# EAGLE board 001 (EAGLE 9.2.2)
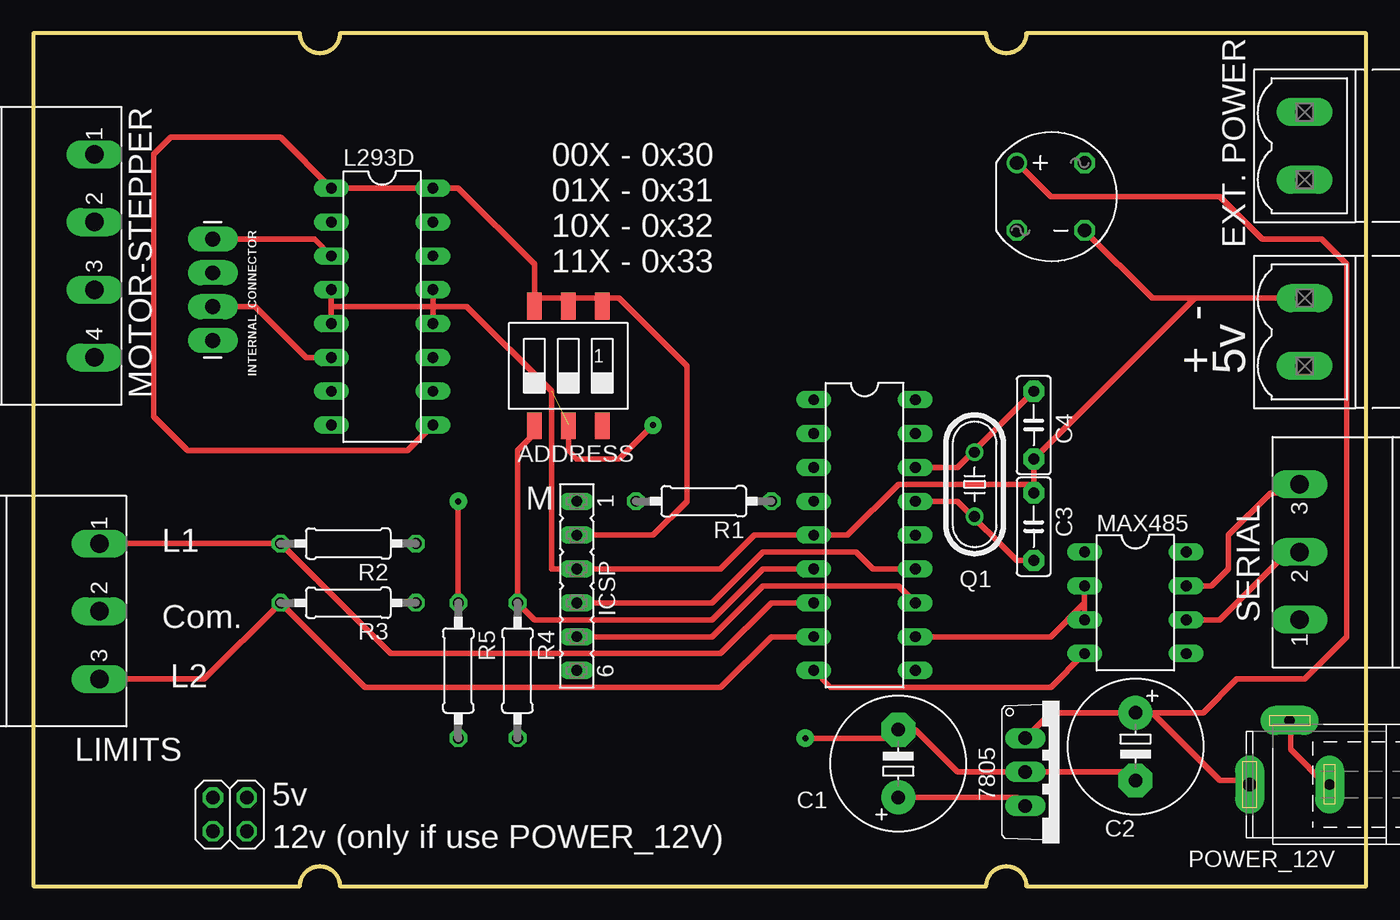
[diagram p0: board, top side]
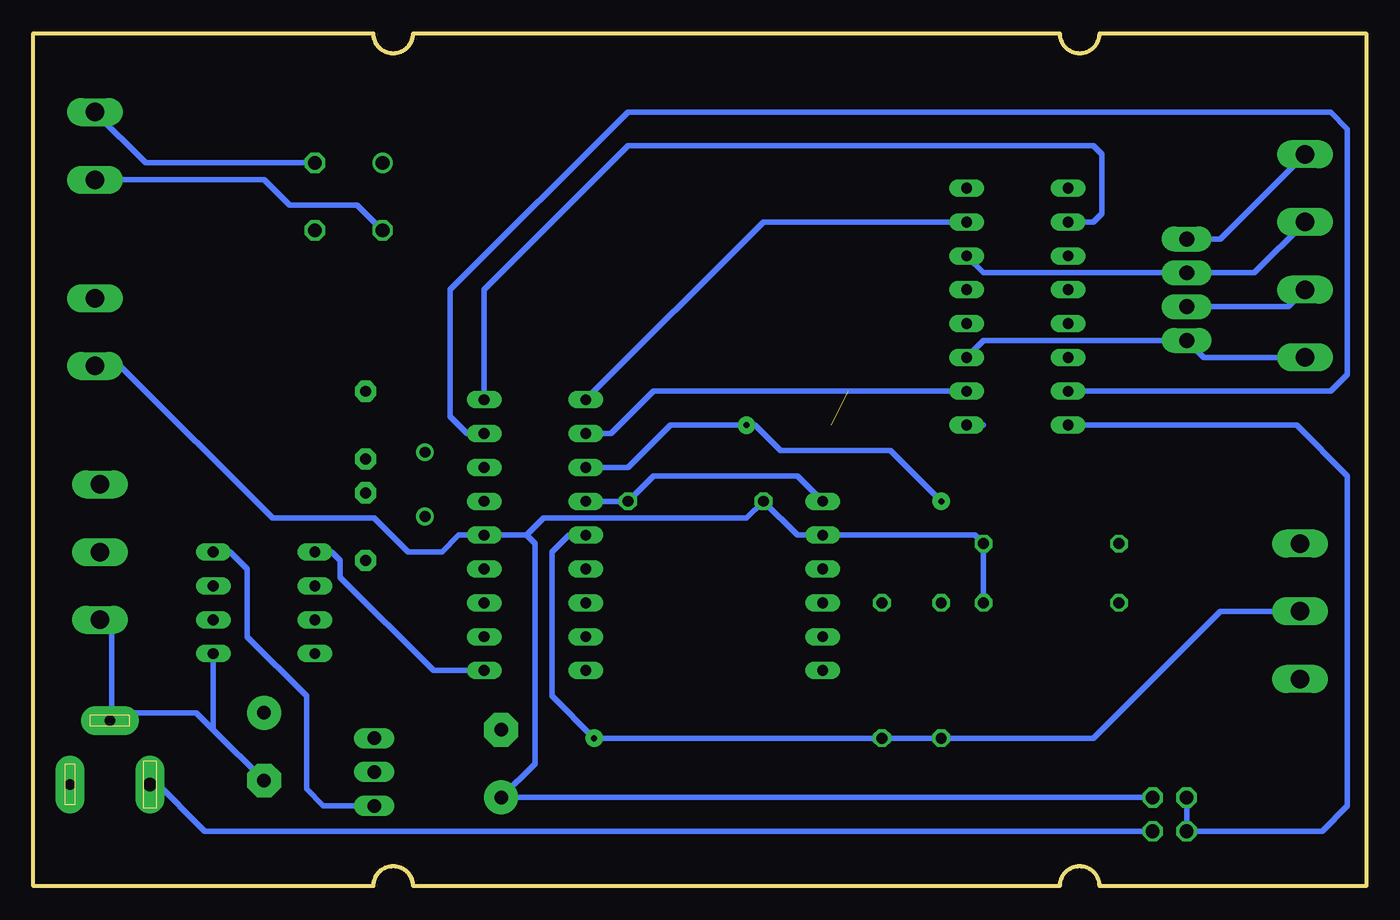
[diagram p1: board, bottom side, seen from below]

Size 100 x 64 mm. Coordinates in mm from the lower left corner, seen from the top.
Outline: 0,0 20,0 arc-180 23,0 71.5,0 arc-180 74.5,0 100,0 100,64 74.5,64 arc-180 71.5,64 23,64 arc-180 20,64 0,64 0,0
Copper layers (1*16): Top 0.035mm / dielectric 1.5mm / Bottom 0.035mm
Design rules "default": minimum track width 6mil, minimum drill 0.35mm, track to track 6mil, track to pad 6mil, pad to pad 6mil, via to via 6mil, smd to smd 6mil, copper to edge 40mil, drill to drill 6mil, minimum pad ring 10mil, minimum via ring 8mil, stop-mask expansion 4mil, vias tented up to drill 0mil, thermal gap 10mil

## Footprints (pad centres in the part's own frame; a part is rotated, then mirrored left to right if it is on the bottom)
2X02 = drill 1.016 octagon: 1 -1.27,-1.27; 2 -1.27,1.27; 3 1.27,-1.27; 4 1.27,1.27
TO220V = drill 1.016 long: 1 -2.54,-2.54; 2 0,-2.54; 3 2.54,-2.54
SMS-003 = smd 1.092 x 2.007: 1 -2.54,-4.496; 2 0,-4.496; 3 2.54,-4.496; 4 2.54,4.496; 5 0,4.496; 6 -2.54,4.496
E5-10,5 = drill 1.016 pad 2.54: + -2.54,0 | drill 1.016 pad 2.54 octagon: - 2.54,0
C5B2.5 = drill 0.813 pad 1.6 octagon: 1 -2.54,0; 2 2.54,0
MSTBV2R = drill 1.397 long: 1 -2.54,0; 2 2.54,0
RB1A = drill 1.016: + -2.54,2.54 | drill 1.016 octagon: - 2.54,-2.54; AC1 2.54,2.54; AC2 -2.54,-2.54
FE06 = drill 0.813 long: 1 -6.35,0; 2 -3.81,0; 3 -1.27,0; 4 1.27,0; 5 3.81,0; 6 6.35,0
1X04_LONGPADS = drill 1.118 pad 1.88 long: 1 0,0; 2 2.54,0; 3 5.08,0; 4 7.62,0
DIL16 = drill 0.813 long: 1 -8.89,-3.81; 2 -6.35,-3.81; 3 -3.81,-3.81; 4 -1.27,-3.81; 5 1.27,-3.81; 6 3.81,-3.81; 7 6.35,-3.81; 8 8.89,-3.81; 9 8.89,3.81; 10 6.35,3.81; 11 3.81,3.81; 12 1.27,3.81; 13 -1.27,3.81; 14 -3.81,3.81; 15 -6.35,3.81; 16 -8.89,3.81
MSTBA3 = drill 1.397 long: 1 -5.08,5.08; 2 0,5.08; 3 5.08,5.08
DIL08 = drill 0.813 long: 1 -3.81,-3.81; 2 -1.27,-3.81; 3 1.27,-3.81; 4 3.81,-3.81; 5 3.81,3.81; 6 1.27,3.81; 7 -1.27,3.81; 8 -3.81,3.81
MSTBA4 = drill 1.397 long: 1 -7.62,5.08; 2 -2.54,5.08; 3 2.54,5.08; 4 7.62,5.08
DIL18 = drill 0.813 long: 1 -10.16,-3.81; 2 -7.62,-3.81; 3 -5.08,-3.81; 4 -2.54,-3.81; 5 0,-3.81; 6 2.54,-3.81; 7 5.08,-3.81; 8 7.62,-3.81; 9 10.16,-3.81; 10 10.16,3.81; 11 7.62,3.81; 12 5.08,3.81; 13 2.54,3.81; 14 0,3.81; 15 -2.54,3.81; 16 -5.08,3.81; 17 -7.62,3.81; 18 -10.16,3.81
SPC4077 = drill 0.8 pad 2.184 long: 1 -3,0; 2 0,-4.8 | drill 1 pad 2.184 long: 3 3,0
HC49/S = drill 0.813: 1 -2.413,0; 2 2.413,0
0207/10 = drill 0.813 octagon: 1 -5.08,0; 2 5.08,0

## Placement (x,y rotation side)
12V_5V  [2X02]  14.74,5.39 0 top
7805  [TO220V]  76.97,8.56 270 top
ADDRESS  [SMS-003]  40.14,39.04 180 top
C1  [E5-10,5]  64.9,9.2 90 top
C2  [E5-10,5]  82.68,10.47 270 top
C3  [C5B2.5]  75.06,26.98 90 top
C4  [C5B2.5]  75.06,34.6 90 top
E$1  [MSTBV2R]  95.38,55.55 90 top
E$2  [MSTBV2R]  95.38,41.58 90 top
E$3  [RB1A]  76.33,51.74 0 top
ICSP  [FE06]  40.77,22.53 270 top
INTERNAL_CONNECTOR  [1X04_LONGPADS]  13.47,40.95 90 top
L293D  [DIL16]  26.17,43.49 270 top
LIMITS  [MSTBA3]  -0.13,20.63 270 top
MAX485  [DIL08]  82.68,21.26 270 top
MOTOR-STEPPER  [MSTBA4]  -0.5,47.3 270 top
PIC18F1  [DIL18]  62.36,26.34 270 top
POWER_12V  [SPC4077]  94.26,7.63 180 top
Q1  [HC49/S]  70.62,30.15 90 top
R1  10k  [0207/10]  50.3,28.88 180 top
R2  10k  [0207/10]  23.63,25.71 180 top
R3  10k  [0207/10]  23.63,21.26 180 top
R4  10k  [0207/10]  36.33,16.18 270 top
R5  10k  [0207/10]  31.88,16.18 270 top
SERIAL  [MSTBA3]  100.09,25.07 90 top

## Library data of the parts
12V_5V = pinhead
7805 = transistor
ADDRESS = smd-special
C1 C2 = rcl
C3 C4 = capacitor-wima
E$1 E$2 = con-phoenix-500
E$3 = rectifier
ICSP = con-lsta
INTERNAL_CONNECTOR = SparkFun-Connectors
L293D MAX485 PIC18F1 = 40xx
LIMITS MOTOR-STEPPER SERIAL = con-phoenix-508
POWER_12V = con-jack
Q1 = crystal
R1-R5 = resistor

## Nets
S$1: 12V_5V.1 12V_5V.2 L293D.8
S$2: MAX485.6
S$5: C3.1 PIC18F1.15
S$6: C4.2 PIC18F1.16
S$7: MAX485.2 MAX485.3 PIC18F1.11
S$8: MAX485.8
S$9: C2.- MAX485.5
S$10: MAX485.1
S$11: ICSP.1 PIC18F1.4 R1.1
S$12: L293D.2 PIC18F1.18
S$13: PIC18F1.6 R4.1
S$14: MAX485.4 PIC18F1.9
S$15: C1.- C3.2 C4.1 E$2.2 E$3.- ICSP.3 L293D.4 L293D.5 L293D.12 L293D.13 PIC18F1.3 PIC18F1.5 R5.1
S$16: PIC18F1.13
S$17: ICSP.5 PIC18F1.12
S$18: PIC18F1.1
S$20: L293D.10 PIC18F1.2
S$21: 12V_5V.4 C1.+ E$2.1 ICSP.2 L293D.1 L293D.9 L293D.16 PIC18F1.14 R1.2 R2.1 R3.1
S$22: INTERNAL_CONNECTOR.2 L293D.6 MOTOR-STEPPER.3
S$23: 12V_5V.3
S$24: INTERNAL_CONNECTOR.4 L293D.3
S$25: L293D.7 PIC18F1.17
S$26: INTERNAL_CONNECTOR.3 L293D.14 MOTOR-STEPPER.2
S$27: E$1.2 E$3.AC1
S$28: INTERNAL_CONNECTOR.1 L293D.11 MOTOR-STEPPER.4
S$29: PIC18F1.7 R2.2
S$30: PIC18F1.8 R3.2
S$31: E$1.1 E$3.AC2
S$32: 7805.1 E$3.+

## Tracks (layer width: path | path; a pad name or v marks a point on that pad's centre or on a via)
S$1
  Bottom 0.406: L293D.8 5.21,34.6 1.4,30.79 1.4,6.02 3.31,4.12 12V_5V.1 12V_5V.2
S$2
  Top 0.406: 94.11,25.07 89.03,19.99 MAX485.6
S$4
  Top 0.406: 94.11,29.52 92.84,29.52 89.67,26.34 89.67,23.8 88.4,22.53 87.13,22.53
S$5
  Top 0.406: PIC18F1.15 69.35,28.88 73.79,24.44 C3.1
S$6
  Top 0.406: PIC18F1.16 69.35,31.42 C4.2
S$7
  Top 0.406: MAX485.2 78.87,21.26 | 78.87,21.26 MAX485.3 | PIC18F1.11 76.33,18.72 78.87,21.26
S$8
  Bottom 0.406: MAX485.8 85.22,25.07 83.95,23.8 83.95,18.72 79.51,14.28 79.51,7.29 78.24,6.02 73.79,6.02
S$9
  Bottom 0.406: MAX485.5 86.49,11.74 | 86.49,11.74 87.76,13.01 94.11,13.01 94.11,19.99 | 86.49,11.74 C2.-
S$10
  Bottom 0.406: MAX485.1 77.6,25.07 76.97,24.44 76.97,23.17 69.98,16.18 66.17,16.18
S$11
  Bottom 0.406: PIC18F1.4 R1.1 53.47,30.79 42.68,30.79 ICSP.1
S$12
  Bottom 0.406: PIC18F1.18 66.17,44.76 55.38,55.55 54.74,55.55 20.45,55.55 19.82,54.92 19.82,50.47 20.45,49.84 L293D.2
S$13
  Top 0.406: PIC18F1.6 54.74,23.8 50.93,19.99 37.6,19.99 R4.1 36.33,32.69 37.6,33.96
S$14
  Top 0.406: PIC18F1.9 59.82,14.91 76.33,14.91 MAX485.4
S$15  (via drill 0.45 pad 1.3)  (1 unrouted)
  Top 0.406: 40.14,34.6 40.14,32.69 40.77,32.06 43.95,32.06 v46.49,34.6 | L293D.13 29.98,43.49 | 29.98,43.49 L293D.12 | L293D.4 22.36,43.49 | 22.36,43.49 L293D.5 | 29.98,43.49 22.36,43.49 | 29.98,43.49 32.52,43.49 38.87,37.14 38.87,23.8 ICSP.3 51.57,23.8 54.11,26.34 PIC18F1.5 61.09,26.34 64.9,30.15 75.06,30.15 | 75.06,30.15 C4.1 87.13,44.12 E$2.2 83.95,44.12 E$3.- | 75.06,30.15 C3.2 | 82.05,8.56 69.35,8.56 66.17,11.74 C1.- 64.27,11.1 v57.92,11.1 | v31.88,28.88 R5.1
  Bottom 0.406: PIC18F1.5 59.82,26.34 61.09,25.07 61.09,14.28 v57.92,11.1 20.45,11.1 10.93,20.63 5.21,20.63 | PIC18F1.3 55.38,31.42 52.2,34.6 v46.49,34.6 45.85,34.6 43.95,32.69 35.69,32.69 v31.88,28.88
S$16
  Top 0.406: PIC18F1.13 63,23.8 61.73,25.07 54.74,25.07 50.93,21.26 40.77,21.26
S$17
  Top 0.406: ICSP.5 50.93,18.72 54.74,22.53 64.9,22.53 PIC18F1.12
S$18
  Bottom 0.406: 30.61,49.84 45.22,49.84 PIC18F1.1
S$20
  Bottom 0.406: L293D.10 53.47,37.14 56.65,33.96 PIC18F1.2
S$21
  Top 0.406: L293D.9 28.07,32.69 11.56,32.69 9.02,35.23 9.02,54.92 10.29,56.19 18.55,56.19 L293D.1 L293D.16 31.88,52.38 37.6,46.66 37.6,44.12 43.95,44.12 49.03,39.04 49.03,28.88 46.49,26.34 ICSP.2 | 73.79,6.66 C1.+
  Bottom 0.406: 28.71,34.6 L293D.9 | 63,26.34 62.36,25.71 62.36,9.2 C1.+ 12V_5V.4 | 63,26.34 PIC18F1.14 68.08,26.34 69.35,25.07 71.89,25.07 74.43,27.61 82.05,27.61 93.48,39.04 E$2.1 | 63,26.34 61.73,27.61 46.49,27.61 R1.2 42.68,26.34 ICSP.2 29.34,26.34 R2.1 R3.1
S$22
  Top 0.406: L293D.6 20.45,39.68 16.64,43.49 INTERNAL_CONNECTOR.2
  Bottom 0.406: INTERNAL_CONNECTOR.2 5.85,43.49 MOTOR-STEPPER.3
S$23
  Bottom 0.406: 90.94,7.93 87.13,4.12 12V_5V.3
S$24
  Top 0.406: INTERNAL_CONNECTOR.4 21.09,48.57 L293D.3
  Bottom 0.406: INTERNAL_CONNECTOR.4 10.93,48.57 4.58,54.92
S$25
  Bottom 0.406: PIC18F1.17 67.44,33.96 68.71,35.23 68.71,44.76 55.38,58.09 2.67,58.09 1.4,56.82 1.4,38.41 2.67,37.14 L293D.7
S$26
  Bottom 0.406: MOTOR-STEPPER.2 8.39,46.03 INTERNAL_CONNECTOR.3 28.71,46.03 L293D.14
S$27
  Bottom 0.406: E$1.2 91.57,54.28 E$3.AC1
S$28
  Bottom 0.406: MOTOR-STEPPER.4 12.2,39.68 INTERNAL_CONNECTOR.1 28.71,40.95 L293D.11
S$29
  Top 0.406: 5.21,25.71 R2.2 26.8,17.45 51.57,17.45 55.38,21.26 PIC18F1.7
S$30
  Top 0.406: 5.21,15.55 12.83,15.55 R3.2 24.9,14.91 51.57,14.91 55.38,18.72 PIC18F1.8
S$31
  Bottom 0.406: E$1.1 82.68,53.01 80.78,51.11 75.7,51.11 E$3.AC2
S$32
  Top 0.406: E$3.+ 76.33,51.74 89.03,51.74 92.21,48.57 96.65,48.57 98.56,46.66 98.56,18.72 95.38,15.55 90.3,15.55 87.76,13.01 83.95,13.01 | 83.95,13.01 82.68,13.01 76.33,13.01 7805.1 | 83.95,13.01 89.03,7.93 90.94,7.93
S$219
  Top 0.406: 94.33,12.19 94.33,10.28 97.06,7.55

## Text on the board
tNames: EXT. POWER | 00X - 0x30 / 01X - 0x31 / 10X - 0x32 / 11X - 0x33 | 5v | + - | M | L1 | Com. | L2 | 5v | 12v (only if use POWER_12V)
tValues: PIC18F1320